# EAGLE board MRCS-RING_GENERATOR-BREAKOUT-array (EAGLE 7.7.0)
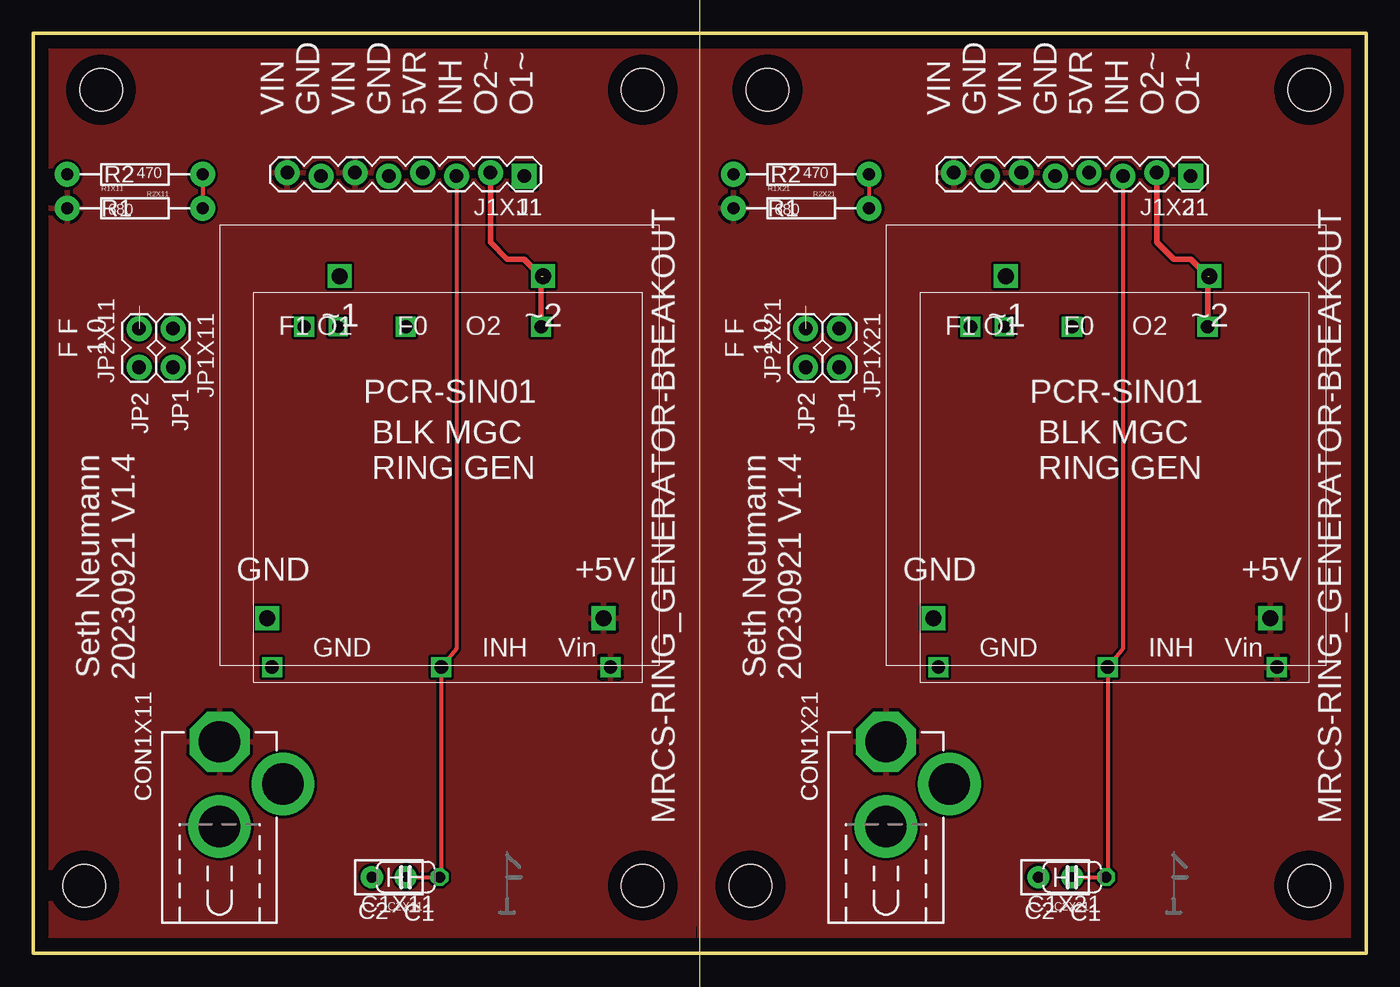
[diagram p0: board, top side]
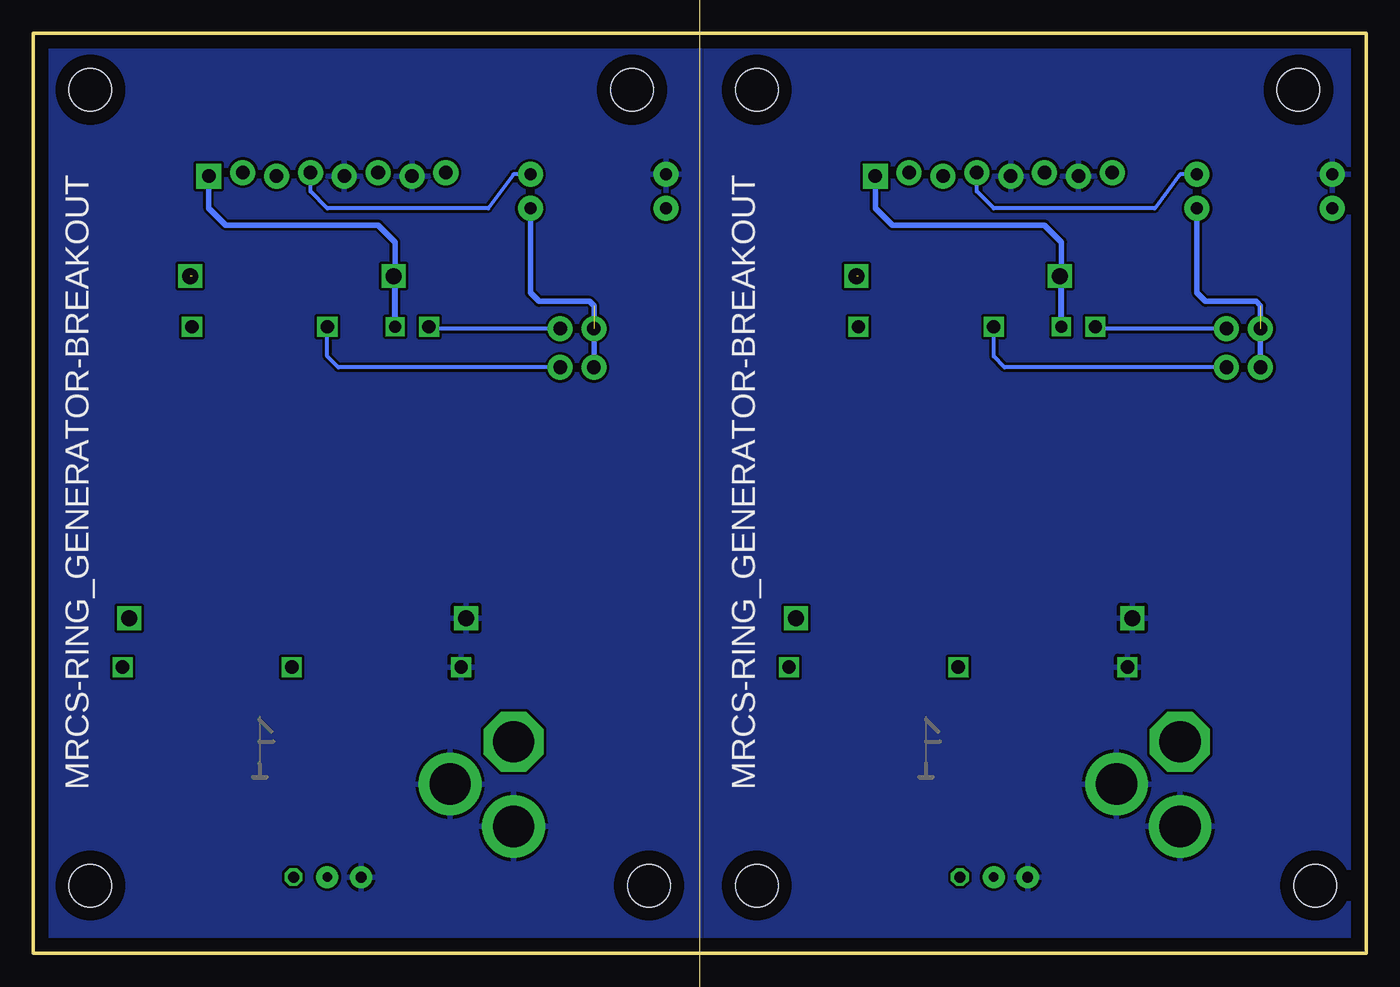
[diagram p1: board, bottom side, seen from below]

Size 100 x 69 mm. Coordinates in mm from the lower left corner, seen from the top.
Outline: 0,0 100,0 100,69 0,69 0,0
Copper layers (1*16): Top 0.035mm / dielectric 1.5mm / Bottom 0.035mm
Design rules "default": minimum track width 10mil, minimum drill 24mil, track to track 8mil, track to pad 8mil, pad to pad 8mil, via to via 8mil, smd to smd 8mil, copper to edge 40mil, drill to drill 8mil, minimum pad ring 10mil, minimum via ring 8mil, stop-mask expansion 4mil, vias tented up to drill 0mil, thermal gap 10mil
Holes 3.2 mm at 45.72,64.77 3.81,5.08 45.72,5.08 5.08,64.77 95.72,64.77 53.81,5.08 95.72,5.08 55.08,64.77
Milling: 1 lines

## Footprints (pad centres in the part's own frame; a part is rotated, then mirrored left to right if it is on the bottom)
C050-024X044 = drill 0.813 octagon: 1 -2.54,0; 2 2.54,0
C-PTH-0.100 = drill 0.7 pad 1.651: 1 -1.27,0; 2 1.27,0
DCJ0202 = drill 3.1 pad 4.5 octagon: 1 0,3.175 | drill 3.1 pad 4.7: 2 4.763,0; 3 0,-3.175
1X08_LOCK = drill 1.016 pad 1.88 square: 1 0,0.127 | drill 1.016 pad 1.88: 2 2.54,-0.127; 3 5.08,0.127; 4 7.62,-0.127; 5 10.16,0.127; 6 12.7,-0.127; 7 15.24,0.127; 8 17.78,-0.127
1X02_LOCK = drill 1.016 pad 1.88: 1 -0.178,0; 2 2.718,0
AXIAL-0.4-RES = drill 0.9 pad 1.88: P$1 -5.08,0; P$2 5.08,0
PCR-SIN01 = drill 1 square: P$1 1.143,27.813; P$2 1.143,15.113; P$3 1.143,2.413; P$4 26.67,25.4; P$6 26.67,17.78; P$7 26.67,7.62 | drill 0.9 square: P$5 26.67,22.86
BLACK_MAGIC_RING_GEN = drill 1.2 square: P$1 9.017,29.21; P$2 24.257,29.21; P$3 28.829,3.556; P$4 3.556,3.556

## Placement (x,y rotation side)
C1X11  0.1uF  [C050-024X044]  27.94,5.71 180 top
C1X21  0.1uF  [C050-024X044]  77.94,5.71 180 top
C2X11  0.1uF  [C-PTH-0.100]  26.67,5.71 180 top
C2X21  0.1uF  [C-PTH-0.100]  76.67,5.71 180 top
CON1X11  [DCJ0202]  13.97,12.7 0 top
CON1X21  [DCJ0202]  63.97,12.7 0 top
J1X11  [1X08_LOCK]  36.83,58.42 180 top
J1X21  [1X08_LOCK]  86.83,58.42 180 top
JP1X11  [1X02_LOCK]  10.48,46.67 270 top
JP1X21  [1X02_LOCK]  60.48,46.67 270 top
JP2X11  [1X02_LOCK]  7.94,44.13 90 top
JP2X21  [1X02_LOCK]  57.94,44.13 90 top
R1X11  680  [AXIAL-0.4-RES]  7.62,55.88 0 top
R1X21  680  [AXIAL-0.4-RES]  57.62,55.88 0 top
R2X11  470  [AXIAL-0.4-RES]  7.62,58.42 180 top
R2X21  470  [AXIAL-0.4-RES]  57.62,58.42 180 top
U$1X11  PCR-SIN01  [PCR-SIN01]  45.72,20.32 90 top
U$1X21  PCR-SIN01  [PCR-SIN01]  95.72,20.32 90 top
U$2X11  [MRCSLOGOTOP]  34.29,2.54 0 top
U$2X21  [MRCSLOGOTOP]  84.29,2.54 0 top
U$3X11  [CA-PROP65WARNING]  25.4,35.56 0 top
U$3X21  [CA-PROP65WARNING]  75.4,35.56 0 top
U$4X11  [MRCSLOGOBTM]  26.67,12.7 0 top
U$4X21  [MRCSLOGOBTM]  76.67,12.7 0 top
U$5X11  BLACK_MAGIC_RING_GEN  [BLACK_MAGIC_RING_GEN]  13.97,21.59 0 top
U$5X21  BLACK_MAGIC_RING_GEN  [BLACK_MAGIC_RING_GEN]  63.97,21.59 0 top

## Library data of the parts
C1X11 C1X21 C2X11 C2X21 CON1X11 CON1X21 J1X11 J1X21 JP1X11 JP1X21 JP2X11 JP2X21 R1X11 R1X21 R2X11 R2X21 = SPCoast
U$1X11 U$1X21 U$5X11 U$5X21 = MRCS
U$2X11 U$2X21 = MRCSLogoTop
U$3X11 U$3X21 = MRCS-prop65warningBtm
U$4X11 U$4X21 = MRCSLogoBtm

## Nets
5VREFX11: J1X11.4 JP2X11.1 JP2X11.2 R1X11.P$2 R2X11.P$1
5VREFX21: J1X21.4 JP2X21.1 JP2X21.2 R1X21.P$2 R2X21.P$1
F0X11: JP1X11.2 U$1X11.P$6
F0X21: JP1X21.2 U$1X21.P$6
F1X11: JP1X11.1 U$1X11.P$4
F1X21: JP1X21.1 U$1X21.P$4
GNDX11: C1X11.2 C2X11.2 CON1X11.2 CON1X11.3 J1X11.5 J1X11.7 R2X11.P$2 U$1X11.P$1 U$5X11.P$4
GNDX21: C1X21.2 C2X21.2 CON1X21.2 CON1X21.3 J1X21.5 J1X21.7 R2X21.P$2 U$1X21.P$1 U$5X21.P$4
INHX11: C1X11.1 C2X11.1 J1X11.3 U$1X11.P$2
INHX21: C1X21.1 C2X21.1 J1X21.3 U$1X21.P$2
O1X11: J1X11.1 U$1X11.P$5 U$5X11.P$1
O1X21: J1X21.1 U$1X21.P$5 U$5X21.P$1
O2X11: J1X11.2 U$1X11.P$7 U$5X11.P$2
O2X21: J1X21.2 U$1X21.P$7 U$5X21.P$2
VINX11: CON1X11.1 J1X11.6 J1X11.8 R1X11.P$1 U$1X11.P$3 U$5X11.P$3
VINX21: CON1X21.1 J1X21.6 J1X21.8 R1X21.P$1 U$1X21.P$3 U$5X21.P$3

## Tracks (layer width: path | path; a pad name or v marks a point on that pad's centre or on a via)
5VREFX11  (1 unrouted)
  Top 0.305: R2X11.P$1 R1X11.P$2
  Bottom 0.305: R2X11.P$1 13.97,58.42 15.88,55.88 27.94,55.88 29.21,57.15 J1X11.4
  Bottom 0.406: JP2X11.1 7.94,48.58 8.26,48.9 12.06,48.9 12.7,49.53 R1X11.P$2
5VREFX21  (1 unrouted)
  Top 0.305: R2X21.P$1 R1X21.P$2
  Bottom 0.305: R2X21.P$1 63.97,58.42 65.88,55.88 77.94,55.88 79.21,57.15 J1X21.4
  Bottom 0.406: JP2X21.1 57.94,48.58 58.26,48.9 62.06,48.9 62.7,49.53 R1X21.P$2
F0X11
  Bottom 0.305: JP1X11.2 27.13,43.95 27.94,44.77 U$1X11.P$6
F0X21
  Bottom 0.305: JP1X21.2 77.13,43.95 77.94,44.77 U$1X21.P$6
F1X11
  Bottom 0.305: JP1X11.1 20.18,46.85 U$1X11.P$4
F1X21
  Bottom 0.305: JP1X21.1 70.18,46.85 U$1X21.P$4
GNDX11
  pour Bottom: 0,0 49.53,0 49.53,68.58 0,68.58
GNDX21
  pour Bottom: 50,0 99.53,0 99.53,68.58 50,68.58
INHX11
  Top 0.305: J1X11.3 31.75,22.86 U$1X11.P$2 30.61,5.84 C1X11.1 C2X11.1
INHX21
  Top 0.305: J1X21.3 81.75,22.86 U$1X21.P$2 80.61,5.84 C1X21.1 C2X21.1
O1X11
  Bottom 0.305: U$5X11.P$1 22.99,47.12 U$1X11.P$5
  Bottom 0.406: U$1X11.P$5 22.86,53.34 24.13,54.61 35.56,54.61 36.83,55.88 J1X11.1
O1X21
  Bottom 0.305: U$5X21.P$1 72.99,47.12 U$1X21.P$5
  Bottom 0.406: U$1X21.P$5 72.86,53.34 74.13,54.61 85.56,54.61 86.83,55.88 J1X21.1
O2X11  (1 unrouted)
  Top 0.406: J1X11.2 34.29,53.34 35.56,52.07 36.83,52.07 38.1,50.8 U$1X11.P$7
O2X21  (1 unrouted)
  Top 0.406: J1X21.2 84.29,53.34 85.56,52.07 86.83,52.07 88.1,50.8 U$1X21.P$7
VINX11
  pour Top: 0,0 49.53,0 50.16,68.58 0,68.58
VINX21
  pour Top: 50,0 99.53,0 100.17,68.58 50,68.58

## Text on the board
tPlace: VIN / GND / VIN / GND / 5VR / INH / O2~ / O1~ | VIN / GND / VIN / GND / 5VR / INH / O2~ / O1~ | MRCS-RING_GENERATOR-BREAKOUT | MRCS-RING_GENERATOR-BREAKOUT | F F / 1 0 | F F / 1 0 | F1 O1 | F0 O2 | F1 O1 | F0 O2 | PCR-SIN01 | PCR-SIN01 | Seth Neumann / 20230921 V1.4 | Seth Neumann / 20230921 V1.4 | GND | INH | Vin | GND | INH | Vin
bPlace: MRCS-RING_GENERATOR-BREAKOUT | MRCS-RING_GENERATOR-BREAKOUT
Milling: V-Score
tDocu: J1 | J1 | CON1 | CON1
_tNames: R2 | R2 | R2 | R2 | J1 | J1 | J1 | J1 | R1 | R1 | R1 | R1 | JP1 | JP1 | JP1 | JP1 | JP2 | JP2 | JP2 | JP2 | CON1 | CON1 | CON1 | CON1 | C2 | C2 | C1 | C1 | C2 | C2 | C1 | C1